# Altium PCB SV601286G_PCB.PcbDoc (part 1 of 2)
Units mil, origin at the board's own origin, x right, y up, seen from the top; angles counter-clockwise.
Board outline 2750 x 2300 mil, 2 copper layers (Top Layer, Bottom Layer), stack 61 mil thick; 81 components, 27 nets, 133 pads, 50 vias.
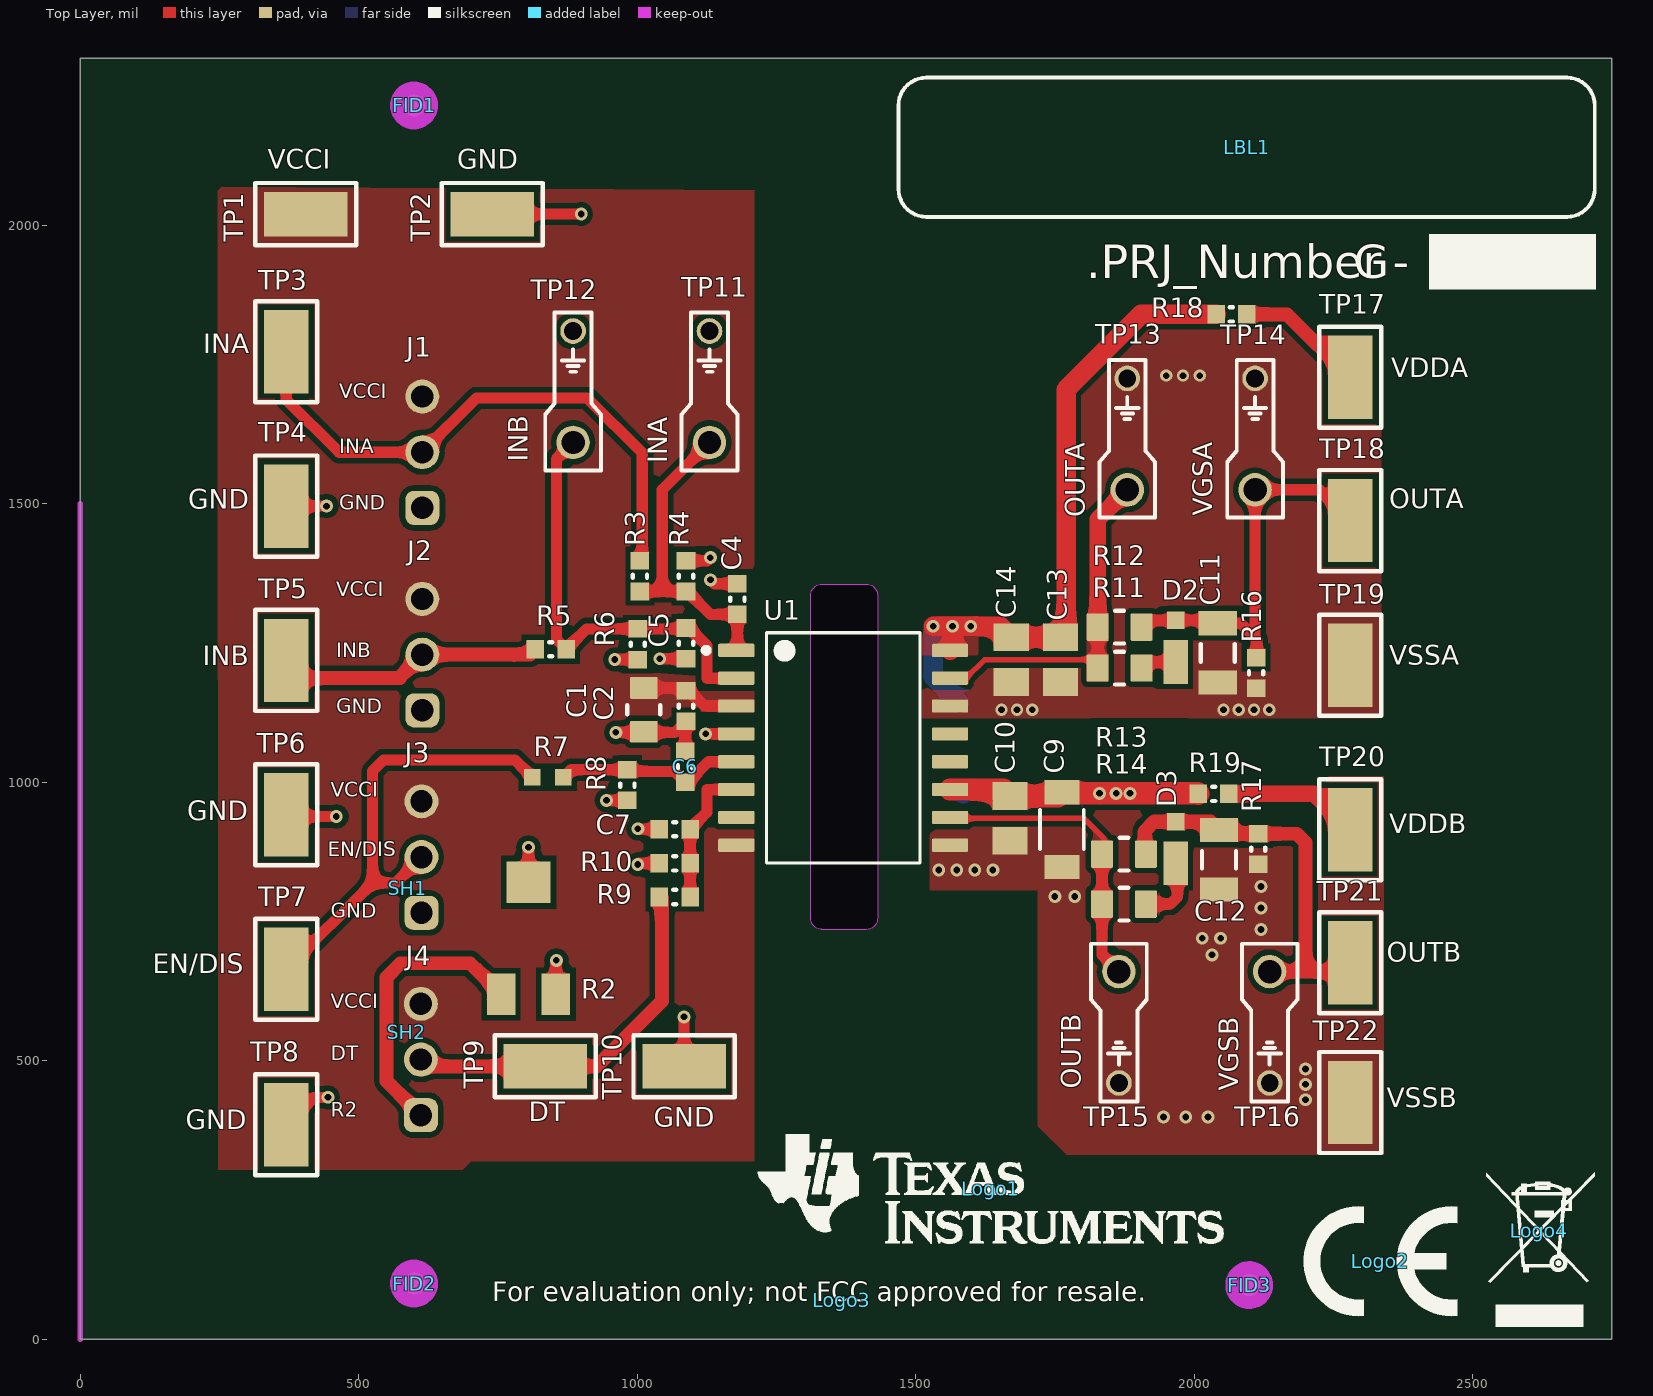
[diagram p0: Top Layer view]
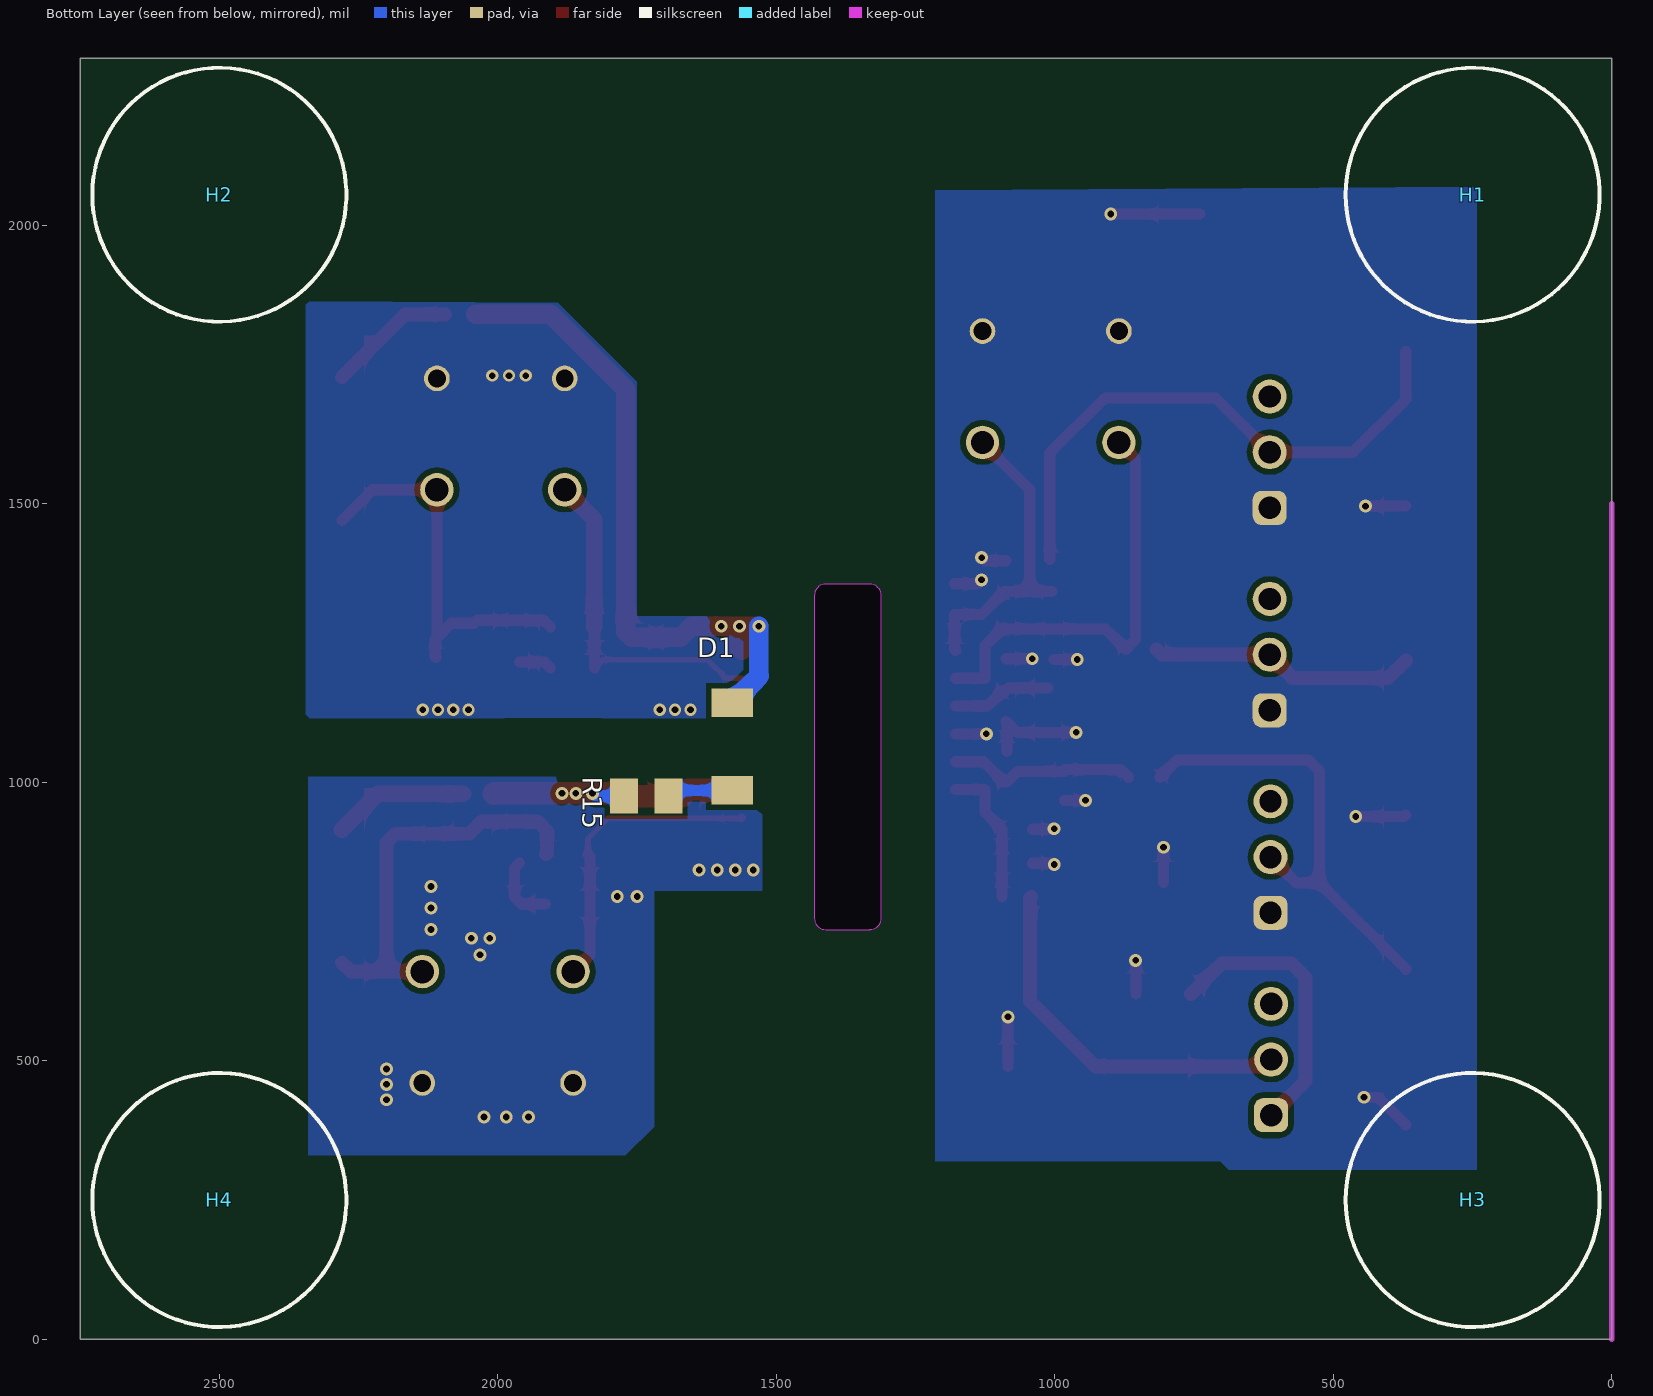
[diagram p1: Bottom Layer view, seen from below]

## Layer stack, top to bottom
Top Solder: solder mask 0.4, Solder Resist, Dk 3.5
Top Layer: signal copper 1.4
Dielectric1: core 58.2, FR-4, Dk 4.8
Bottom Layer: signal copper 1.4
Bottom Solder: solder mask 0.4, Solder Resist, Dk 3.5

## Board outline
0,0 2750,0 2750,2300 0,2300
cut-out: 1311.72,755.79 1311.72,1335.4 cw(c1331.72,1335.4) 1331.72,1355.4 1411.72,1355.4 cw(c1411.72,1335.4) 1431.72,1335.4 1431.72,755.4 cw(c1411.72,755.4) 1411.72,735.4 1331.72,735.4 1331.72,735.79 cw(c1331.72,755.79)

## Design rules (kind name [scope] priority, off if disabled: settings)
AcuteAngle [All] p1: minimum=4.50000000000000E+0001 checktracksonly=FALSE
AssemblyTestPointUsage [All] p1: valid=2
Clearance Clearance_1 [InNetClass('Ch-A') vs InNetClass('Ch-B')] p1: gap=80 ignorepadtopadclearanceinfootprint=FALSE except(0: Arc-Hole Track-Hole SMDPad-Hole THPad-Hole Via-Hole Fill-Hole Poly-Hole Region-Hole Text-Hole)
Clearance Clearance_Keepouts [((IsTrack Or IsArc) And Not InPoly) And IsFree and IsKeepOut vs ((IsTrack Or IsArc) And Not InPoly) And IsFree and IsKeepOut] p2: gap=10 ignorepadtopadclearanceinfootprint=FALSE except(0: Arc-Hole Track-Hole SMDPad-Hole THPad-Hole Via-Hole Fill-Hole Poly-Hole Region-Hole Text-Hole)
Clearance Clearance_BoardEdge_MountingHoles [OnCopper and InComponentClass('Mounting Holes') vs IsKeepOut] p3: gap=35 ignorepadtopadclearanceinfootprint=FALSE except(0: Arc-Hole Track-Hole SMDPad-Hole THPad-Hole Via-Hole Fill-Hole Poly-Hole Region-Hole Text-Hole)
Clearance Clearance_BoardEdge_Poly [OnCopper and InPoly vs IsKeepOut] p4: gap=25 ignorepadtopadclearanceinfootprint=FALSE except(0: Arc-Hole Track-Hole SMDPad-Hole THPad-Hole Via-Hole Fill-Hole Poly-Hole Region-Hole Text-Hole)
Clearance Clearance_BoardEdge [OnCopper and Not InComponentClass('Logo') and not InComponentClass('FiducialMark') and not InRegion(1000,500,4000,800) and Not IsKeepout vs IsKeepOut] p5: gap=35 ignorepadtopadclearanceinfootprint=FALSE except(0: Arc-Hole Track-Hole SMDPad-Hole THPad-Hole Via-Hole Fill-Hole Poly-Hole Region-Hole Text-Hole)
Clearance Clearance_Poly [InPolygon] p6: gap=10 ignorepadtopadclearanceinfootprint=FALSE except(0: Arc-Hole Track-Hole SMDPad-Hole THPad-Hole Via-Hole Fill-Hole Poly-Hole Region-Hole Text-Hole)
Clearance [All] p7: gap=10 ignorepadtopadclearanceinfootprint=FALSE
ComponentClearance ComponentClearance_MountingHoles_FiducialMarks [InComponentClass('Mounting Holes') vs InComponentClass('FiducialMark')] p1: gap=20 collisioncheckmode=3 verticalgap=10 showdistances=FALSE
ComponentClearance ComponentClearance_Shunt [InComponentClass('Header') vs InComponentClass('Shunt')] p2: gap=0 collisioncheckmode=3 verticalgap=0 showdistances=FALSE
ComponentClearance ComponentClearance_Logo [InComponentClass('Logo')] p3: gap=20 collisioncheckmode=3 verticalgap=10 showdistances=FALSE
ComponentClearance ComponentClearance_ScrewToNut [(HasFootprint('NY PMS 440 0025 PH')) vs (HasFootprint('Keystone_1902C'))] p4: gap=5 collisioncheckmode=3 verticalgap=10 showdistances=FALSE
ComponentClearance ComponentClearance_MountingHoles [InComponentClass('Mounting Holes')] p5: gap=20 collisioncheckmode=3 verticalgap=100000 showdistances=TRUE
ComponentClearance ComponentClearance_SmallPassives [HasFootprint('0201*') or HasFootprint('0402*') or HasFootprint('0508') or HasFootprint('0603*') or HasFootprint('0612') or HasFootprint('0805*') or HasFootprint('0815*') or HasFootprint('0830*') or HasFootprint('1206*') or HasFootprint('1210*') or HasFootprint('1808*') or HasFootprint('1812*') or HasFootprint('1825*') or HasFootprint('2010*') or HasFootprint('2220*') or HasFootprint('2225*') or HasFootprint('2512*') or HasFootprint('2728*') or HasFootprint('3518*') vs HasFootprint('0201*') or HasFootprint('0402*') or HasFootprint('0508') or HasFootprint('0603*') or HasFootprint('0612') or HasFootprint('0805*') or HasFootprint('0815*') or HasFootprint('0830*') or HasFootprint('1206*') or HasFootprint('1210*') or HasFootprint('1808*') or HasFootprint('1812*') or HasFootprint('1825*') or HasFootprint('2010*') or HasFootprint('2220*') or HasFootprint('2225*') or HasFootprint('2512*') or HasFootprint('2728*') or HasFootprint('3518*')] p6: gap=5 collisioncheckmode=3 verticalgap=10 showdistances=TRUE
ComponentClearance ComponentClearance_THtoSMT [IsThruComponent vs IsSMTComponent] p7: gap=10 collisioncheckmode=3 verticalgap=30 showdistances=TRUE
ComponentClearance ComponentClearance_THtoTH [IsThruComponent vs IsThruComponent] p8: gap=20 collisioncheckmode=3 verticalgap=30 showdistances=TRUE
ComponentClearance [All] p9: gap=10 collisioncheckmode=3 verticalgap=10 showdistances=TRUE
DiffPairsRouting [All] p1: maxlimit=100 minlimit=10 mostfreqgap=10 toplayer_minwidth=15 toplayer_maxwidth=15 toplayer_prefwidth=15 bottomlayer_minwidth=15 bottomlayer_maxwidth=15 bottomlayer_prefwidth=15 maxuncoupledlength=1000
FabricationTestPointUsage TestPointUsage [All] p1: valid=2 allowmultiple=FALSE
FabricationTestpoint Testpoint [All] p1: side=3 testpointundercomponent=TRUE minsize=40 maxsize=100 preferedsize=60 minholesize=0 maxholesize=40 preferedholesize=32 testpointgrid=1 allowsidetop=TRUE allowsidebottom=TRUE usegrid=TRUE gridtolerance=0.01
FanoutControl Fanout_LCC [IsLCC] p1: bgadir=Out bgaviamode=Centered fanoutstyle=Auto fanoutdirection=Alternating viagrid=1 // Fanout_LCC (Default Rule)
FanoutControl Fanout_BGA [IsBGA] p2: bgadir=Out bgaviamode=Centered fanoutstyle=Auto fanoutdirection=Alternating viagrid=1 // Fanout_BGA (Default Rule)
FanoutControl Fanout_Default [All] p4: bgadir=Out bgaviamode=Centered fanoutstyle=Auto fanoutdirection=Alternating viagrid=1 // Fanout_Default (Default Rule)
FanoutControl Fanout_Small [(CompPinCount < 5)] p5: bgadir=Out bgaviamode=Centered fanoutstyle=Auto fanoutdirection=OutThenIn viagrid=1 // Fanout_Small (Default Rule)
HoleSize [All] p1: absolutevalues=TRUE maxlimit=251 minlimit=8 maxpercent=80.000 minpercent=20.000
MinimumAnnularRing MinimumAnnularRing_ThermalPadVias [IsVia and InAnyComponent] p1: minimumring=5.91
MinimumAnnularRing [All] p2: minimumring=5
MinimumSolderMaskSliver MinimumSolderMaskSliver_Logo [InComponentClass('Logo') vs InComponentClass('Logo')] p1: minsoldermaskwidth=0.7
MinimumSolderMaskSliver [All] p2: minsoldermaskwidth=0
PlaneConnect [All] p1: planeconnectstyle=Relief reliefexpansion=10 reliefentries=4 reliefconductorwidth=10 reliefairgap=10
PolygonConnect [All] p1: connectstyle=Direct reliefconductorwidth=20 reliefentries=4 polygonreliefangle="90 Angle" airgapwidth=10
RoutingVias ThermalPadVias [IsVia and InAnyComponent] p1: holewidth=7.87 width=19.68 viastyle="Through Hole" minholewidth=7.87 minwidth=19.68 maxholewidth=12.99 maxwidth=26
RoutingVias [All] p2: holewidth=16 width=34 viastyle="Through Hole" minholewidth=7.87 minwidth=20 maxholewidth=40 maxwidth=65
SilkToBoardRegionClearance [Not ((IsComment or IsDesignator) And (Hide <> 'False')) and not InRegion(1000,500,4000,800)] p1:
SilkToSilkClearance SilkToSilkClearance_Pb-FreeLogo [(HasFootprint('Pb-Free_Overlay_Medium') OR HasFootprint('Pb-Free_Overlay_Small')) vs (HasFootprint('Pb-Free_Overlay_Medium') OR HasFootprint('Pb-Free_Overlay_Small'))] p1: silktosilkclearance=0
SilkToSilkClearance [All] p2: silktosilkclearance=2
SilkToSolderMaskClearance "Silk to Solder Mask Opening" [All] p1: minsilkscreentomaskgap=0 clearancetoexposedcopper=FALSE
SolderMaskExpansion [All] p1: expansion=1.97
UnRoutedNet [All] p1: checkbadconnections=TRUE
Width [All] p1: maxlimit=100 minlimit=6 preferedwidth=20 minimp=50.000000 maximp=50.000000 favimp=50.000000 checkconnectedcopper=TRUE
14 further rules are at their usual default settings.

## Classes and differential pairs
net class Ch-B: NetD1_2 NetD3_1 NetR19_2 OUTB OUTB_CAP VDDB VSSB
net class Ch-A: NetD2_1 NetR18_2 OUTA OUTA_CAP VDDA VSSA
component class Label: LBL1
component class AssemblyNote: ZZ1 ZZ2 ZZ3 ZZ4 ZZ5 ZZ6 ZZ7
component class Header: J1 J2 J3 J4
component class SV601286F_Schematic: C1 C2 C4 C5 C6 C7 C9 C10 C11 C12 C13 C14 D1 D2 D3 J1 J2 J3 J4 R2 R3 R4 R5 R6 R7 R8 R9 R10 R11 R12 R13 R14 R15 R16 R17 R18 R19 TP1 TP2 TP3 TP4 TP5 TP6 TP7 TP8 TP9 TP10 TP11 TP12 TP13 TP14 TP15 TP16 TP17 TP18 TP19 TP20 TP21 TP22 U?
component class Logo: Logo1
component class FiducialMark: FID1 FID2 FID3
component class Shunt: SH1 SH2
component class SV601286F_Hardware: FID1 FID2 FID3 H1 H2 H3 H4 LBL1 Logo1 Logo2 Logo3 Logo4 SH1 SH2 ZZ1 ZZ2 ZZ3 ZZ4 ZZ5 ZZ6 ZZ7

## Components (designator, comment, footprint, x,y, rotation, side; value= is the part's Value field where it differs from the comment)
C1 "CL21B105KBFNFNE" 0805_HV1 1012.03,1130 r270 top value=1uF
C2 "C1608X7R1E104K080AA" 0603L 1087.81,1136.79 r270 top value=0.1uF
C4 "GRM1885C1H330JA01D" 0603L 1180,1328.84 r90 top value=33pF
C5 "GRM1885C1H330JA01D" 0603L 1087.81,1249.35 r270 top value=33pF
C6 "C0603C222K5RACTU" 0603L 1086.26,1027.7 r90 top value=2200pF
C7 "C0603C222K5RACTU" 0603L 1067.56,915.68 r180 top value=2200pF
C9 "CL31B106KBHNNNE" 1206_180 1762.59,915 r270 top value=10uF
C10 "C0805C104J5RACTU" 0805_HV 1669.17,935 r90 top value=0.1uF
C11 "GRM3195C1H102JA01D" 1206L 2042.44,1232.36 r270 top value=1000pF
C12 "GRM3195C1H102JA01D" 1206L 2044.66,860.83 r270 top value=1000pF
C13 "CL21B105KBFNFNE" 0805_HV 1760.41,1220.24 r270 top value=1uF
C14 "C0805C104J5RACTU" 0805_HV 1671.71,1220.24 r270 top value=0.1uF
D1 "600V" SMA 1579.2,1064.1 r270 bottom
D2 "30V" MicroSMP 1966.97,1241.47 r90 top
D3 "30V" MicroSMP 1966.97,880 r90 top
FID1 "Fiducial" Fiducial10-20 599.53,2215 r0 top
FID2 "Fiducial" Fiducial10-20 599.53,100 r0 top
FID3 "Fiducial" Fiducial10-20 2098.94,97.16 r0 top
H1 "SJ-5303 (CLEAR)" Bumpon_SJ5003Transparent 250,2054.73 r180 bottom locked
H2 "SJ-5303 (CLEAR)" Bumpon_SJ5003Transparent 2500,2054.73 r180 bottom locked
H3 "SJ-5303 (CLEAR)" Bumpon_SJ5003Transparent 250,250 r180 bottom locked
H4 "SJ-5303 (CLEAR)" Bumpon_SJ5003Transparent 2500,250 r180 bottom locked
J1 "TSW-103-07-T-S" Samtec_TSW-103-07-T-S 614.26,1592.49 r90 top
J2 "TSW-103-07-T-S" Samtec_TSW-103-07-T-S 614.26,1229.04 r90 top
J3 "TSW-103-07-T-S" Samtec_TSW-103-07-T-S 612.85,865.59 r90 top
J4 "TSW-103-07-T-S" Samtec_TSW-103-07-T-S 611.71,502.14 r90 top
LBL1 "Label" Label_1250x250 2094.19,2140 r0 top
Logo1 "Texas Instruments" TI_Stacked_Overlay_Small 1635,270 r0 top
Logo2 "CE Mark" CE_Mark_5mm 2334.33,140 r0 top
Logo3 "FCC disclaimer" FCC_disclaimer 1367.02,70 r0 top
Logo4 "WEEE logo" WEEE_Minimum 2620,194.93 r0 top
R2 "3224X-1-104E" TRIM_3224X 805,720 r90 top value=100K
R3 "CRCW0603100RFKEA" 0603L 1005,1370 r270 top value=100
R4 "ERJ-3EKF1002V" 0603L 1087.81,1370 r270 top value=10.0k
R5 "CRCW0603100RFKEA" 0603L 845,1238.65 r0 top value=100
R6 "ERJ-3EKF1002V" 0603L 1001.2,1247.8 r90 top value=10.0k
R7 "CRCW0603100RFKEA" 0603_HV 839.55,1009 r0 top value=100
R8 "ERJ-3EKF1002V" 0603L 982.5,995 r90 top value=10.0k
R9 "RCS06030000Z0EA" 0603L 1067.56,793.9 r0 top value=0
R10 "ERJ-3EKF1002V" 0603L 1067.56,854.41 r0 top value=10.0k
R11 "RC0805FR-073R9L" 0805_HV1 1866.19,1205.06 r0 top value=3.90
R12 "ERJ-P06F10R0V" 0805_HV1 1866.19,1278.55 r0 top value=10.0
R13 "ERJ-P06F10R0V" 0805_HV1 1874.06,871 r0 top value=10.0
R14 "RC0805FR-073R9L" 0805_HV1 1874.06,781.26 r0 top value=3.90
R15 "RC0805FR-073R9L" 0805_HV 1733.86,975 r180 bottom value=3.90
R16 "ERJ-3EKF1002V" 0603L 2111.24,1196.2 r90 top value=10.0k
R17 "ERJ-3EKF1002V" 0603L 2115,880 r90 top value=10.0k
R18 "RCS06030000Z0EA" 0603L 2067.05,1840 r0 top value=0
R19 "RCS06030000Z0EA" 0603L 2035,979.1 r0 top value=0
SH1 "Shunt" SPC02SYAN 587.85,810 r90 top value=1x2
SH2 "Shunt" SPC02SYAN 586.71,551.11 r90 top value=1x2
TP1 "VCCI" Keystone_5019 404.84,2020 r180 top
TP2 "GND" Keystone_5019 740,2020 r180 top
TP3 "INA" Keystone_5019 370,1772.87 r90 top
TP4 "GND" Keystone_5019 370,1495.73 r90 top
TP5 "INB" Keystone_5019 370,1218.59 r90 top
TP6 "GND" Keystone_5019 370,941.45 r90 top
TP7 "EN/DIS" Keystone_5019 370,664.3 r90 top
TP8 "GND" Keystone_5019 370,385 r90 top
TP9 "DT" Keystone_5019 835,490 r180 top
TP10 "GND" Keystone_5019 1084.32,490 r180 top
TP11 "INA" TESTPOINT_PIGTAIL 1129.98,1610 r180 top
TP12 "INB" TESTPOINT_PIGTAIL 885,1610 r180 top
TP13 "OUTA" TESTPOINT_PIGTAIL 1880,1525 r180 top
TP14 "VGSA" TESTPOINT_PIGTAIL 2109.46,1525 r180 top
TP15 "OUTB" TESTPOINT_PIGTAIL 1865,660 r0 top
TP16 "VGSB" TESTPOINT_PIGTAIL 2135.63,660 r0 top
TP17 "VDDA" Keystone_5019 2280,1727.07 r90 top
TP18 "OUTA" Keystone_5019 2280,1469.83 r90 top
TP19 "VSSA" Keystone_5019 2280,1209.83 r90 top
TP20 "VDDB" Keystone_5019 2280,914.8 r90 top
TP21 "OUTB" Keystone_5019 2280,675.89 r90 top
TP22 "VSSB" Keystone_5019 2280,425 r90 top
U1 "UCC21520DW" DW0016B-MFG 1370,1061.8 r0 top
ZZ1 "These assemblies are ESD sensitive, ESD precautions shall be observed." AssemblyNote 220,3510 r0 top
ZZ2 "These assemblies must be clean and free from flux and all contaminants. Use of no clean flux is not acceptable." AssemblyNote 220,3310 r0 top
ZZ3 "These assemblies must comply with workmanship standards IPC-A-610 Class 2, unless otherwise specified." AssemblyNote 220,3120 r0 top
ZZ4 "For -001: Shunt #1 (SH1) should be installed in PIN 1-2 for J3" AssemblyNote 220,2930 r0 top
ZZ5 "For -002 and -003: Shunt #1 (SH1) should be installed in PIN 2-3 for J3" AssemblyNote 220,2770 r0 top
ZZ6 "Shunt #2 (SH2) should be installed in PIN 2-3 for J4" AssemblyNote 220,2590 r0 top
ZZ7 "Install label in silkscreen box after final wash. Text shall be 8pt font. Text shall be per Label Table in PDF schematic." AssemblyNote 220,2425 r0 top

## Footprints (in the part's own frame and the unit in brackets; to place one, negate y for a bottom-side part, rotate by r counter-clockwise, add the part's x,y. Pads: shape width x height; smd on the part's side, far side on the other; paste and mask are expansions set on the pad)
0603_HV [mil] "Ernesto recommended land pattern.  26 mil between pads."
  rect 30x30 smd: 1(-28,0) 2(28,0)
  body extent -34,-19 34,19, height 39
0603L [mm] "0603 from SM-752 data"
  rect 0.8x0.85 smd: 1(-0.7,0) 2(0.7,0)
  silkscreen extent -0.07,-0.33 0.07,0.33, body extent -0.87,-0.47 0.87,0.47, height 1
0805_HV [mil] "0805 with 30mil clearance between pads"
  rect 50x63 smd: 1(-40,0) 2(40,0)
  body extent -43,-29 43,29, height 57
0805_HV1 [mm] "Custom footprint based on analyzing multiple manufacturer recommendations"
  rrect10% 1x1.25 smd: 1(-1,0) 2(1,0)
  silkscreen extent -0.2,-0.75 0.2,0.75, body extent -1.1,-0.72 1.1,0.73, height 1.45
1206_180 [mm] "1206_180"
  rect 1.1x1.6 smd: 1(-1.7,0) 2(1.7,0)
  silkscreen extent -0.9,-1 0.9,1, body extent -1.75,-0.95 1.75,0.95, height 1.8
1206L [mm] "1206 from SM-752 data"
  rect 1.1x1.75 smd: 1(-1.35,0) 2(1.35,0)
  silkscreen extent -0.4,-0.77 0.4,0.77, body extent -1.7,-0.9 1.7,0.9, height 1.35
AssemblyNote [mil] "Assembly Note"
Bumpon_SJ5003Transparent [mil] "3M Hemispherical Bumpon transparent"
  round 1 on Mech4: 0(0,0)
  silkscreen extent -228,-228 228,228, body extent -219,-219 219,219, height 197
CE_Mark_5mm [mil] "Minimum text height for CE Mark"
  silkscreen extent -138,-98 138,98
DW0016B-MFG [mm]
  rrect17% 1.65x0.6 smd paste+0 mask+0: 1(-4.875,4.445) 2(-4.875,3.175) 3(-4.875,1.905) 4(-4.875,0.635) 5(-4.875,-0.635) 6(-4.875,-1.905) 7(-4.875,-3.175) 8(-4.875,-4.445) 9(4.875,-4.445) 10(4.875,-3.175) 11(4.875,-1.905) 12(4.875,-0.635) 13(4.875,0.635) 14(4.875,1.905) 15(4.875,3.175) 16(4.875,4.445)
  silkscreen extent -6.37,-5.25 3.5,5.25, body extent -5.8,-5.5 5.8,5.5, height 0.25
FCC_disclaimer [mil]
Fiducial10-20 [mm]
  round 1 smd mask+0.5: 1(0,0)
  Top Layer keep-out circle w1.178: c0,0 r0.5
Keystone_5019 [mm] "Test Point, Miniature, SMT"
  rect 3.8x2.03 smd: 1(0,0)
  silkscreen extent -2.31,-1.42 2.31,1.42, body extent -1.9,-1.02 1.9,1.02, height 2.29
Label_1250x250 [mil] "Thermal Transfer Labels"
  round 1 on Mech13: 0(0,0)
  silkscreen extent -625,-125 625,125, body extent -625,-125 625,125, height 1
MicroSMP [mm] "SMD, 2-Leads, Body 2.2x1.3mm"
  rect 2x1.1 smd: 1(-0.65,0)
  rect 0.8x0.8 smd: 2(1.25,0)
  body extent -1.15,-0.7 1.15,0.7, height 0.75
Samtec_TSW-103-07-T-S [mm] "Header, 2.54 mm, 3x1, TH"
  rrect50% 1.55x1.55 hole 1.02: 1(-2.54,0)
  round 1.55 hole 1.02: 2(0,0) 3(2.54,0)
  body extent -3.81,-1.27 3.81,1.27, height 8.39
SMA [mm] "Molded Diode, 2-Leads, Body 4.3x2.6mm, IPC Medium Density, based on OnSemi component dimensions and land pattern"
  rect 1.3x1.9 smd: 1(-2,0) 2(2,0)
  body extent -2.6,-1.3 2.6,1.3, height 2.42
SPC02SYAN [mil] "SULLINS"
  round 1 on Mech3: 0(0,0)
  body extent -98,-47 99,47, height 366
TESTPOINT_PIGTAIL [mil] "Pigtail"
  round 60 hole 42: 1(0,0)
  round 46 hole 32: 2(0,-200)
  silkscreen extent -50,-233 50,50
TI_Stacked_Overlay_Small [mil]
  silkscreen extent -418,-98 418,98
TRIM_3224X [mm] "Bourns"
  rect 1.9x1.3 smd: 1(-2.55,1.25) 3(-2.55,-1.25)
  rect 1.9x2 smd: 2(2.55,0)
  body extent -1.8,-2.4 1.8,2.4, height 5.31
WEEE_Minimum [mil] "WEEElie bin"
  silkscreen extent -95,-172 99,104

## Part data
C1 C13: library part CMP-0080611-1, "CAP, CERM, 1 µF, 50 V,+/- 10%, X7R, 0805", Cap_Case=0805, Manufacturer=Samsung, Supplier Part Number 1=1276-2928-1-ND, TempCo=X7R, Tolerance_%=10%, Value2=50V, ValueDisplayed=1µF, AEC Category=Q200, AEC Grade=N/A, AEC Qualified=N, Cap_F=1µF, ComponentLink1Description="Datasheet link", ComponentLink1URL=http://www.samsungsem.com/kr/support/product-search/mlcc/__icsFiles/afieldfile/2016/08/18/S_CL21B105KBFNFNE.pdf, CompType=Capacitor, MountType=SMT, PackageReference=0805, PartNumber=CL21B105KBFNFNE, Polarized=N, RoHS=Y, SizeArea_mm2=2.5, SizeAreaWB_mm2=6.75, SizeX_mm=2, SizeY_mm=1.25, SizeZ_mm=1.45, Supplier 1=Digi-Key, TaMax_C=125°C, TaMin_C=-55°C, Technology=Ceramic, U/M=EA, VDC_V=50V
C2: library part CMP-0007039-5, "CAP, CERM, 0.1 uF, 25 V, +/- 10%, X7R, 0603", Cap_Case=0603, Manufacturer=TDK, Supplier Part Number 1=445-1316-1-ND, TempCo=X7R, Tolerance_%=10%, Value1=Unknown, Value2=25V, ValueDisplayed=0.1uF, AEC Category=Q200, AEC Qualified=?, Cap_F=100nF, ComponentLink1Description="Datasheet link", ComponentLink1URL=http://www.tdk.com/pdf/TDKMLCCCapRange.pdf, CompType=Capacitor, LatestRevisionDate=2017-03-09, MountType=SMT, PackageReference=0603, PartNumber=C1608X7R1E104K080AA, Polarized=N, Published=2008-06-19, Publisher="Texas Instruments", RoHS=Y, SizeArea_mm2=1.28, SizeAreaWB_mm2=4.68, SizeX_mm=1.6, SizeY_mm=0.8, SizeZ_mm=1, Supplier 1=Digi-Key, Supplier 2=Newark, Supplier Part Number 2=87R3692, TaMax_C=125°C, TaMin_C=-55°C, Technology=Ceramic, U/M=EA, VDC_V=25V
C4 C5: library part CMP-0007208-4, "CAP, CERM, 33 pF, 50 V, +/- 5%, C0G/NP0, 0603", Cap_Case=0603, Manufacturer=MuRata, Supplier Part Number 1=490-1415-1-ND, TempCo=C0G/NP0, Tolerance_%=5%, Value1=Unknown, Value2=50V, ValueDisplayed=33pF, AEC Category=Q200, AEC Qualified=?, Cap_F=33pF, ComponentLink1Description="Datasheet link", ComponentLink1URL=http://search.murata.co.jp/Ceramy/PnsearchViewAction.do?HnOFG=ON&HnNFG=ON&SEL_CNT=50&sLang=en&sKey=GRM1885C1H330JA01D&x=9&y=9&search=startwith, CompType=Capacitor, LatestRevisionDate=2017-03-09, MountType=SMT, PackageReference=0603, PartNumber=GRM1885C1H330JA01D, Polarized=N, Published=2008-06-19, Publisher="Texas Instruments", RoHS=Y, SizeArea_mm2=1.28, SizeAreaWB_mm2=4.68, SizeX_mm=1.6, SizeY_mm=0.8, SizeZ_mm=1, Supplier 1=Digi-Key, Supplier 2=Mouser, Supplier 3=Farnell, Supplier Part Number 2=81-GRM39C330J50, Supplier Part Number 3=1828910, TaMax_C=125°C, TaMin_C=-55°C, Technology=Ceramic, U/M=EA, VDC_V=50V
C6 C7: library part CMP-0006898-4, "CAP, CERM, 2200 pF, 50 V, +/- 10%, X7R, 0603", Cap_Case=0603, Manufacturer=Kemet, Supplier Part Number 1=399-1085-1-ND, TempCo=X7R, Tolerance_%=10%, Value1=Unknown, Value2=50V, ValueDisplayed=2200pF, AEC Category=Q200, AEC Qualified=?, Cap_F=2.2nF, ComponentLink1Description="Datasheet link", ComponentLink1URL=http://www.kemet.com/kemet/web/homepage/kechome.nsf/vapubfiles/F3102_Y5V.pdf/$file/F3102_Y5V.pdf, CompType=Capacitor, LatestRevisionDate=2017-03-09, MountType=SMT, PackageReference=0603, PartNumber=C0603C222K5RACTU, Polarized=N, Published=2008-06-19, Publisher="Texas Instruments", RoHS=Y, SizeArea_mm2=1.28, SizeAreaWB_mm2=4.68, SizeX_mm=1.6, SizeY_mm=0.8, SizeZ_mm=1, Supplier 1=Digi-Key, Supplier 2=Mouser, Supplier 3=Farnell, Supplier Part Number 2=80-C0603C222K5R, Supplier Part Number 3=1414624, TaMax_C=125°C, TaMin_C=-55°C, Technology=Ceramic, U/M=EA, VDC_V=50V
C9: library part CMP-0008802-1, "CAP, CERM, 10 uF, 50 V, +/- 10%, X7R, 1206", Cap_Case=1206, Manufacturer=Samsung, Supplier Part Number 1=1276-6767-1-ND, TempCo=X7R, Tolerance_%=10%, Value1=Unknown, Value2=50V, ValueDisplayed=10uF, AEC Category=Q200, AEC Grade=N/A, AEC Qualified=N, Cap_F=10µF, ComponentLink1Description="Datasheet link", ComponentLink1URL=https://www.samsungsem.com/kr/front/downloadcms.do?path=%2Fkr%2Fsupport%2Fproduct-search%2Fmlcc%2F__icsFiles%2Fafieldfile%2F2016%2F01%2F04&fileName=Data+sheet_CL31B106KBHNNNE.pdf, CompType=Capacitor, LatestRevisionDate=2017-03-09, MountType=SMT, PackageReference=1206, PartNumber=CL31B106KBHNNNE, Polarized=N, Published=2008-06-19, Publisher="Texas Instruments", RoHS=Y, SizeArea_mm2=5.12, SizeAreaWB_mm2=10.92, SizeX_mm=3.2, SizeY_mm=1.6, SizeZ_mm=1.8, Supplier 1=Digi-Key, TaMax_C=125°C, TaMin_C=-55°C, Technology=Ceramic, U/M=EA
C10 C14: library part CMP-0007721-1, "CAP, CERM, 0.1 uF, 50 V, +/- 5%, X7R, 0805", Cap_Case=0805, Manufacturer=Kemet, Supplier Part Number 1=64K2889, TempCo=X7R, Tolerance_%=5%, Value1="0.064 ohm", Value2=50V, ValueDisplayed=0.1uF, AEC Category=Q200, AEC Qualified=?, Cap_F=100nF, ComponentLink1Description="Datasheet link", ComponentLink1URL=http://www.kemet.com/kemet/web/homepage/kechome.nsf/file/Partial%20Copy%20-%20Ceramic%20Surface%20Mount%20Capacitors/$file/F3102_CE.pdf, CompType=Capacitor, ESR_Ohm=0.064, IRMS_A=1.64A, LatestRevisionDate=2017-03-09, MountType=SMT, PackageReference=0805, PartNumber=C0805C104J5RACTU, Polarized=N, Published=2008-06-19, Publisher="Texas Instruments", RoHS=Y, SizeArea_mm2=2.5, SizeAreaWB_mm2=6.75, SizeX_mm=2, SizeY_mm=1.25, SizeZ_mm=1.45, Supplier 1=Newark, Supplier 2=Mouser, Supplier 3=Farnell, Supplier Part Number 2=80-C0805C104J5R, Supplier Part Number 3=1414663, TaMax_C=125°C, TaMin_C=-55°C, Technology=Ceramic, U/M=EA
C11 C12: library part CMP-0008829-2, "CAP, CERM, 1000 pF, 50 V, +/- 5%, C0G/NP0, 1206", Cap_Case=1206, Manufacturer=MuRata, Supplier Part Number 1=490-1749-1-ND, TempCo=C0G/NP0, Tolerance_%=5%, Value1=Unknown, Value2=50V, ValueDisplayed=1000pF, AEC Category=Q200, AEC Qualified=?, Cap_F=1nF, ComponentLink1Description="Datasheet link", ComponentLink1URL=http://search.murata.co.jp/Ceramy/PnsearchViewAction.do?HnOFG=ON&HnNFG=ON&SEL_CNT=50&sLang=en&sKey=GRM3195C1H102JA01D&x=9&y=9&search=startwith, CompType=Capacitor, LatestRevisionDate=2017-03-09, MountType=SMT, PackageReference=1206, PartNumber=GRM3195C1H102JA01D, Polarized=N, Published=2008-06-19, Publisher="Texas Instruments", RoHS=Y, SizeArea_mm2=5.12, SizeAreaWB_mm2=10.92, SizeX_mm=3.2, SizeY_mm=1.6, SizeZ_mm=1.35, Supplier 1=Digi-Key, Supplier 2=Mouser, Supplier Part Number 2=81-GRM426C102J050D, TaMax_C=125°C, TaMin_C=-55°C, Technology=Ceramic, U/M=EA, VDC_V=50V
D1: library part CMP-0076908-2, "Diode, Ultrafast, 600 V, 1 A, SMA", Manufacturer=STMicroelectronics, PartNumber=STTH1R06A, Value1=1A, Value2=1V, AEC Category=Q101, AEC Qualified=?, ComponentLink1Description="Datasheet link", ComponentLink1URL=http://www.st.com/web/en/resource/technical/document/datasheet/CD00005135.pdf, CompType=Diode, Green_EU RoHS="Passed with Exemption", Green_EU RoHS-2=Passed, Green_Lifecycle=Active, Green_REACh=Passed, Io_A=1A, MountType=SMT, PackageReference=SMA, RJC_CperW=30.0, RoHS=Y, SizeArea_mm2=16.3228, SizeAreaWB_mm2=37.3428, SizeX_mm=5.59, SizeY_mm=2.92, SizeZ_mm=2.87, TJmax_C=175°C, Type=Ultrafast, Vf_V=1V, Vr_V=600V
D2 D3: library part CMP-0028774-2, "Diode, Schottky, 30 V, 1 A, AEC-Q101, MicroSMP", Manufacturer=Vishay-Semiconductor, PartNumber=MSS1P3L-M3/89A, Value1=1A, Value2=0.35V, AEC Category=Q101, AEC Qualified=Y, ComponentLink1Description="Datasheet link", ComponentLink1URL=http://www.vishay.com/docs/89020/mss1p3l.pdf, CompType=Diode, Green_EU RoHS=Incomplete, Green_EU RoHS-2=Incomplete, Green_Lifecycle="Not Set", Green_REACh=Incomplete, Io_A=1A, MountType=SMT, PackageReference=MicroSMP, RJC_CperW=40, RoHS=Y, SizeArea_mm2=3.25, SizeAreaWB_mm2=8.05, SizeX_mm=2.5, SizeY_mm=1.3, SizeZ_mm=0.73, TJmax_C=150°C, Type=Schottky, Vf_V=350mV, Vr_V=30V
FID1 FID2 FID3: library part CMP-0077181-1, "Fiducial mark.  There is nothing to buy or mount.", Manufacturer=N/A, ClassName=FiducialMark, CompType=Fiducial, MountType=N/A, PackageReference=N/A, PartNumber=N/A
H1 H2 H3 H4: library part CMP-0003620-1, "Bumpon, Hemisphere, 0.44 X 0.20, Clear", Manufacturer=3M, Supplier Part Number 1=SJ5303-7-ND, ComponentLink1Description="Datasheet Link", ComponentLink1URL=http://multimedia.mmm.com/mws/mediawebserver.dyn?6666660Zjcf6lVs6EVs666cIsCOrrrrQ-, CompType=Bumpon, Key="SJ-5303 (CLEAR)", LatestRevisionDate=2017-03-09, MountType=N/A, PackageReference="Transparent Bumpon", PartNumber="SJ-5303 (CLEAR)", Publisher="Texas Instruments", RoHS=Y, Supplier 1=Digi-Key, Supplier 2=Newark, Supplier 3=Mouser, Supplier Part Number 2=23M7326, Supplier Part Number 3=517-SJ-5303CL
J1 J2 J3 J4: library part CMP-0075530-2, "Header, 2.54 mm, 3x1, Tin, TH", Color=Black, Current_A=6.3A, Manufacturer=Samtec, Supplier Part Number 1=SAM1035-03-ND, Voltage_V=550V, Cert_CSA=Y, Cert_CULUS=N, Cert_UL=Y, Cert_VDE=N, ClassName=Header, ComponentLink1Description="Datasheet URL", ComponentLink1URL=http://www.samtec.com/ftppub/cpdf/TSW-XXX-XX-XXX-X-XX-XXX-MKT.pdf, CompType=Header, ContactFinish=Tin, Gender=Male, Green_EU RoHS=Passed, Green_EU RoHS-2=Passed, Green_Lifecycle=Active, Green_REACh=Passed, MountType=TH, Orientation=Vertical, PackageReference="Header, 2.54 mm, 3x1, TH", PartNumber=TSW-103-07-T-S, PinCount=3, Pitch_mm=2.54, RoHS=Y, Row_Count=1, Shrouded=N, Supplier 1=Digi-Key, Supplier 2=Newark, Supplier 3=Farnell, Supplier Part Number 2=12P1325, Supplier Part Number 3=2035682
LBL1: library part CMP-0003624-1, "Thermal Transfer Printable Labels, 1.250\" W x 0.250\" H - 10,000 per roll", Manufacturer=Brady, PartNumber=THT-13-457-10, Supplier Part Number 1=04H3909, ClassName=Label, ComponentLink1Description="Web Page", ComponentLink1URL=http://www.bradyid.com/bradyid/pdpv/THT-13-457-10.html, CompType=Label, Key=THT-13-457-10, LatestRevisionDate=2017-03-09, MountType=N/A, Note="Size: 1.25\" x 0.25\"", PackageReference="PCB Label 1.25 x 0.250 inch", Publisher="Texas Instruments", RoHS=Y, Supplier 1=Newark
Logo1: library part CMP-0074838-1, "Texas Instrument Corporate Signature", ClassName=Logo, LatestRevisionDate=2017-07-06, Lib Reference=TI_Logo, PartNumber="Texas Instruments", Published=2009-03-03, Publisher="Texas Instruments", SymbolCreator=a0412235, SymbolVersion=2011-08-22
Logo2: library part CMP-0074844-1, LatestRevisionDate=2017-07-06, Lib Reference="CE Mark", PartNumber="CE Mark", Published=2009-03-03, Publisher="Texas Instruments", SymbolCreator=a0412235
Logo3: library part CMP-0074847-1, "FCC_disclaimer", LatestRevisionDate=2017-07-06, Lib Reference=FCC_disclaimer, PartNumber="FCC disclaimer", Published=2009-03-03, Publisher="Texas Instruments"
Logo4: library part CMP-0074769-1, Lib Reference="WEEE logo", PartNumber="WEEE logo"
R2: library part CMP-0002065-2, "Trimmer, 100 K, 0.25 W, SMD", Manufacturer=Bourns, Supplier Part Number 1=3224X-1-104ECT-ND, ComponentLink1Description="Datasheet URL", ComponentLink1URL=https://www.bourns.com/data/global/pdfs/3224.pdf, CompType=Trimmer, LatestRevisionDate=09/03/2017, MountType=SMT, PackageReference=3.5x5.3x4.8mm, PartNumber=3224X-1-104E, Publisher="Texas Instruments", RoHS=Y, Supplier 1=Digi-Key, Supplier 2=Newark, Supplier 3=Mouser, Supplier Part Number 2=06X8878, Supplier Part Number 3=652-3224X-1-104E
R3 R5 R7: library part CMP-0021991-4, "RES, 100, 1%, 0.1 W, AEC-Q200 Grade 0, 0603", Manufacturer=Vishay-Dale, Power_W=100mW, Supplier Part Number 1=541-100HCT-ND, TempCo="100 ppm/C", Tolerance_%=1%, Value2=0.1W, Value_Code=100R, ValueDisplayed=100, AEC Category=Q200, AEC Grade=0, AEC Qualified=Y, ComponentLink1Description="Datasheet link", ComponentLink1URL=http://www.vishay.com/docs/20035/dcrcwe3.pdf, CompType=Resistor, EIA_Code=E96, MountType=SMT, PackageReference=0603, PartNumber=CRCW0603100RFKEA, Res_ohm=100, RoHS=E, SizeArea_mm2=1.28, SizeX_mm=1.6, SizeY_mm=0.8, SizeZ_mm=1, Supplier 1=Digi-Key, Supplier 2=Newark, Supplier 3=Mouser, Supplier Part Number 2=52K8078, Supplier Part Number 3=71-CRCW0603-100-E3, Technology="Thick Film", Value1=1%, VDC_V=75V
R4 R6 R8 R10 R16 R17: library part CMP-0022684-3, "RES, 10.0 k, 1%, 0.1 W, 0603", Manufacturer=Panasonic, Power_W=100mW, Supplier Part Number 1=P10.0KHCT-ND, TempCo="100 ppm/C", Tolerance_%=1%, Value2=0.1W, Value_Code=10k0, ValueDisplayed=10.0k, AEC Category=Q200, AEC Qualified=?, ComponentLink1Description="Datasheet link", ComponentLink1URL=http://industrial.panasonic.com/www-data/pdf/AOA0000/AOA0000CE2.pdf, CompType=Resistor, EIA_Code=E96, LatestRevisionDate=2017-03-09, MountType=SMT, PackageReference=0603, PartNumber=ERJ-3EKF1002V, Published=2008-06-26, Publisher="Texas Instruments", Res_ohm=10k, RoHS=Y, SizeArea_mm2=1.28, SizeX_mm=1.6, SizeY_mm=0.8, SizeZ_mm=1, Supplier 1=Digi-Key, Supplier 2=Newark, Supplier 3=Mouser, Supplier Part Number 2=64R5309, Supplier Part Number 3=667-ERJ-3EKF1002V, Technology="Thick Film", U/M=EA, Value1=1%, VDC_V=75V
R9 R18 R19: library part CMP-0081973-1, "RES, 0, 0%, 0.25 W, AEC-Q200 Grade 0, 0603", Manufacturer=Vishay-Dale, Power_W=250mW, Supplier Part Number 1=541-2779-1-ND, Tolerance_%=0%, Value2=0.25W, Value_Code=0, AEC Category=Q200, AEC Grade=0, AEC Qualified=Y, ComponentLink1Description="Datasheet link", ComponentLink1URL=http://www.vishay.com/docs/20065/rcse3.pdf, CompType=Resistor, MountType=SMT, PackageReference=0603, PartNumber=RCS06030000Z0EA, Res_ohm=0, RoHS=Y, SizeArea_mm2=1.28, SizeAreaWB_mm2=4.68, SizeX_mm=1.6, SizeY_mm=0.8, SizeZ_mm=1, Supplier 1=Digi-Key, Supplier 2=Mouser, Supplier Part Number 2=71-RCS06030000Z0EA, Technology="Thick Film", Value1=0%, ValueDisplayed=0
R11 R14 R15: library part CMP-0021926-2, "RES, 3.90, 1%, 0.125 W, 0805", Manufacturer="Yageo America", Power_W=125mW, Supplier Part Number 1=311-3.90CRCT-ND, TempCo="200 ppm/C", Tolerance_%=1%, Value2=0.125W, Value_Code=3R90, ValueDisplayed=3.90, AEC Category=Q200, AEC Qualified=?, ComponentLink1Description="Datasheet link", ComponentLink1URL=http://www.yageo.com/pdf/Pu-RC0805_51_PbFree_L_2.pdf, CompType=Resistor, LatestRevisionDate=2017-03-09, MountType=SMT, PackageReference=0805, PartNumber=RC0805FR-073R9L, Published=2008-06-26, Publisher="Texas Instruments", Res_ohm=3.9, RoHS=Y, SizeArea_mm2=2.5, SizeX_mm=2, SizeY_mm=1.25, SizeZ_mm=1.45, Supplier 1=Digi-Key, Supplier 2=Mouser, Supplier 3=Farnell, Supplier Part Number 2=603-RC0805FR-073R9L, Supplier Part Number 3=9237194, Technology="Thick Film", U/M=EA, Value1=1%, VDC_V=150V
R12 R13: library part CMP-0021849-2, "RES, 10.0, 1%, 0.5 W, AEC-Q200 Grade 0, 0805", Manufacturer=Panasonic, Power_W=500mW, Supplier Part Number 1=P18937CT-ND, TempCo="300 ppm/C", Tolerance_%=1%, Value2=0.5W, Value_Code=10R0, ValueDisplayed=10.0, AEC Category=Q200, AEC Grade=0, AEC Qualified=Y, ComponentLink1Description="Datasheet link", ComponentLink1URL=https://industrial.panasonic.com/cdbs/www-data/pdf/RDA0000/AOA0000C243.pdf, CompType=Resistor, EIA_Code=E96, LatestRevisionDate=2017-03-09, MountType=SMT, PackageReference=0805, PartNumber=ERJ-P06F10R0V, Published=2008-06-26, Publisher="Texas Instruments", Res_ohm=10, RoHS=Y, SizeArea_mm2=2.5, SizeX_mm=2, SizeY_mm=1.25, SizeZ_mm=1.45, Supplier 1=Digi-Key, Supplier 2=Newark, Supplier 3=Mouser, Supplier Part Number 2=32R9412, Supplier Part Number 3=667-ERJ-P06F10R0V, Technology="Thick Film", U/M=EA, Value1=1%
SH1 SH2: library part CMP-0003642-1, "Shunt, 100mil, Flash Gold, Black", Manufacturer="Sullins Connector Solutions", PartNumber=SPC02SYAN, Supplier Part Number 1=S9001-ND, ClassName=Shunt, ComponentLink1Description="Datasheet Link", ComponentLink1URL=http://www.sullinscorp.com/drawings/134_C02SYAN_11134.pdf, CompType=Shunt, Key=SPC02SYAN, LatestRevisionDate=2017-03-09, MountType=N/A, Note="You can \"mate\" this to a header by matching the designator.  i.e. use SH-J3 for header J3", PackageReference="Closed Top 100mil Shunt", Publisher="Texas Instruments", RoHS=Y, Supplier 1=Digi-Key
TP1 TP2 TP3 TP4 TP5 TP6 TP7 TP8 TP9 TP10 TP17 TP18 TP19 TP20 TP21 TP22: library part CMP-0055162-1, "Test Point, Miniature, SMT", Manufacturer=Keystone, PartNumber=5019, Supplier Part Number 1=36-5019TR-ND, CNHeader=FALSE, ComponentLink1Description="Datasheet URL", ComponentLink1URL=http://www.keyelco.com/product-pdf.cfm?p=1357, CompType="Test Point", CT=TRUE, Green_EU RoHS=Passed, Green_EU RoHS-2=Incomplete, Green_Lifecycle=Active, Green_REACh=Passed, LatestRevisionDate=26/05/2017, MountType=SMT, PackageReference="Test Point, Miniature, SMT", Publisher="Texas Instruments", RoHS=Y, Supplier 1=Digi-Key, Supplier 2=Mouser, Supplier Part Number 2=534-5019
TP11 TP12 TP13 TP14 TP15 TP16: library part CMP-0003907-1, "PIGTAIL", Manufacturer="Texas Instruments", PartNumber=TESTPOINT_PIGTAIL, ComponentLink1Description="Datasheet Link", CompType="Test Point", Key=TESTPOINT_PIGTAIL, LatestRevisionDate=2017-03-09, MountType=TH, PackageReference="Pigtail Test Point", Publisher="Texas Instruments"
U1: library part CMP-0090067-1, "Driver 6A 2-OUT High Side/Low Side Half Brdg Non-Inv 16-Pin SOIC Tube", Digikey Part Number=296-44611-5-ND, Manufacturer="Texas Instruments", Max Power Dissipation=1.05W, Max Supply Voltage=18V, Min Supply Voltage=3V, Mouser Part Number=595-UCC21520DW, Nominal Supply Current=2mA, Operating Temperature Range="-40°C to +125°C", Output Voltage=6.5-25V, AEC Qualified=No, ComponentLink1Description=Datasheet, ComponentLink1URL=https://www.ti.com/lit/ds/symlink/ucc21520.pdf, datasheet=https://www.ti.com/lit/ds/symlink/ucc21520.pdf, Datasheet Path=datasheets/IC-UCC21520DW.pdf, Digikey Description="DGTL ISO 5.7KV GATE DRVR 16SOIC", Fall Time=7ns, helpURL=https://upverter.com/upn/revision/31eb2827e17e9876/, Lead Free=Yes, Number Of Drivers=2, Number Of Outputs=2, PackageReference=SOIC16, Part Number=UCC21520DW, PartNumber=UCC21520DW, Propagation Delay=19ns, Rise Time=6ns, RoHS=TRUE, SizeZ_mm=2.65mm, Standoff Height=0.1mm, TaMax_C=+125°C, TaMin_C=-40°C, TJmax_C=+130°C
ZZ1: library part CMP-0077236-1, ClassName=AssemblyNote, CompType=AssemblyNote, Key=AssemblyNote, LatestRevisionDate=2017-08-10, Publisher="Texas Instruments"
ZZ2: library part CMP-0077237-1, ClassName=AssemblyNote, CompType=AssemblyNote, Key=AssemblyNote, LatestRevisionDate=2017-08-10, Publisher="Texas Instruments"
ZZ3: library part CMP-0077238-1, ClassName=AssemblyNote, CompType=AssemblyNote, Key=AssemblyNote, LatestRevisionDate=2017-08-10, Publisher="Texas Instruments"
ZZ4 ZZ5 ZZ6 ZZ7: library part CMP-0077236-1, "These assemblies are ESD sensitive, ESD precautions shall be observed.", ClassName=AssemblyNote, CompType=AssemblyNote, Key=AssemblyNote, LatestRevisionDate=2017-08-10, Publisher="Texas Instruments"

## Via types
v1: diameter 23, hole 12, Top Layer to Bottom Layer, tented both sides, 40 vias
v2: diameter 22, hole 12, Top Layer to Bottom Layer, tented both sides, 10 vias

## Nets (pads, with @x,y where several pads share a name; then routed paths per layer and width w, separated by ;. In a path a pad name is that pad's centre, name@x,y a point inside that pad or via, vN(x,y) a via of type N, cw(c..) or ccw(c..) an arc to the next point about the centre after c; other vN are vias at no path point)
DT: C7.1 R9.2 R10.2 U1.6 | length 258
  Top Layer w20: R9.2 R10.2 C7.1 1125.59,946.16 1125.59,986.8 U1.6
EN/DIS: C6.1 R7.2 R8.2 U1.5 | length 342.4
  Top Layer w20: R7.2 881.11,1022.56 R8.2 982.5,1019.51 1066.89,1019.51 C6.1 1091.91,1000.14 1128.56,1036.8 U1.5
GND: C1.2 C2.2 C4.2 C5.2 C6.2 C7.2 J1.1 J2.1 J3.1 R2.2 R2.3 R4.1 R6.1 R8.1 R10.1 TP2.1 TP4.1 TP6.1 TP8.1 TP10.1 TP11.2 TP12.2 U1.4 | length 1174.2
  Top Layer w20: TP8.1 419.29,434.29 v1(445,434.29) ; TP6.1 372.9,938.54 v1(460,938.54) ; TP4.1 v1(442.19,1495.73) ; TP2.1 v1(899.58,2020) ; R2.2 v1(805,883.2) ; R2.3 854.21,679.39 v1(855,680.17) ; v1(945,967.44) R8.1 ; v1(960,1220.24) R6.1 ; v1(961.83,1089.54) 1068.12,1089.54 C2.2@1086.26,1107.68 ; v1(1001.28,852.32) 1003.37,854.41 R10.1 ; v1(1001.3,916.59) 1002.21,915.68 C7.2 ; v1(1040.57,1221.79) C5.2 ; TP10.1 v1(1084.32,578.72) ; C6.2 C2.2@1086.26,1107.68 ; C2.2 C2.2@1086.26,1107.68 ; R4.1 1125.84,1397.56 v1(1131.5,1403.21) ; v1(1123.02,1086.8) U1.4 ; v1(1131.72,1363.29) 1138.61,1356.4 C4.2
INA: C4.1 R3.2 R4.2 TP11.1 U1.1 | length 560.1
  Top Layer w20: R3.2 1045,1342.44 ; TP11.1 1045,1525.02 1045,1342.44 ; U1.1 1180,1238.73 C4.1 1131.72,1301.28 1090.56,1342.44 1045,1342.44
INB: C5.1 R5.2 R6.2 TP12.1 U1.2 | length 783.9
  Top Layer w20: TP12.1 855,1580 855,1256.21 R5.2 909.26,1275.36 R6.2 1086.26,1275.36 C5.1 1093.45,1276.91 1125.36,1245.01 1125.36,1186.74 1178.01,1186.74 U1.2
NetD1_2: D1.2 R15.2 | length 127.8
  Bottom Layer w20: D1.2 1683.5,985.36 R15.2
  Bottom Layer w35: D1.2 D1.2@1585.46,979.1
NetD2_1: D2.1 R11.2 | length 60
  Top Layer w20: R11.2 1916.38,1215.88 D2.1@1961.06,1215.88
NetD3_1: D3.1 R14.2 | length 125.6
  Top Layer w20: R14.2@1914.64,781.26 1957.32,781.26 1970,793.94 1970,846.26 D3.1@1961.06,855.2
NetJ1_2: J1.2 R3.1 TP3.1 | length 1035.9
  Top Layer w20: TP3.1 370,1687.49 465,1592.49 J1.2 711.77,1690 910,1690 1009.32,1590.68 R3.1@1009.32,1400.36
NetJ2_2: J2.2 R5.1 TP5.1 | length 483.5
  Top Layer w25: TP5.1 401.85,1186.74 574.26,1186.74 574.26,1189.04 J2.2 807.83,1229.04 R5.1
NetJ3_2: J3.2 R7.1 TP7.1 | length 834.6
  Top Layer w20: TP7.1 525,819.3 ; J3.2 566.56,819.3 525,819.3 ; R7.1 780.55,1040 545,1040 525,1020 525,819.3
NetJ4_1: J4.1 R2.1 | length 512.2
  Top Layer w25: J4.1 550,463.85 550,649.54 575.46,675 700.39,675 R2.1
NetJ4_2: J4.2 R9.1 TP9.1 | length 673.4
  Top Layer w25: J4.2 623.85,490 TP9.1 926.7,490 1044.3,607.6 1044.3,792.04 R9.1@1042.44,793.9
NetR18_2: R18.2 TP17.1 | length 232.2
  Top Layer w25: R18.2 2167.07,1840 TP17.1
NetR19_2: R19.2 TP20.1 | length 244.1
  Top Layer w30: R19.2 2215.7,979.1 TP20.1
NetU1_7: 
NetU1_12: 
NetU1_13: 
OUTA: R11.1 R12.1 TP13.1 U1.15 | length 627
  Top Layer w10: U1.15 1590.8,1186.8 1624.25,1220.24 1811.63,1220.24 R11.1
  Top Layer w20: R11.1 R12.1
  Top Layer w30: R12.1 1826.82,1471.82 TP13.1
OUTA_CAP: C11.1 D2.2 R12.2 R16.2 TP14.1 TP18.1 | length 718.2
  Top Layer w20: R12.2 1917.69,1290.69 D2.2 2037.27,1290.69 C11.1 2083.34,1285.51 2109.46,1259.39 ; R16.2 2112.32,1224.84 2112.32,1256.54 2109.46,1259.39 ; TP18.1 2224.83,1525 TP14.1 2109.46,1259.39
OUTB: R13.1 R14.1 TP15.1 U1.10 | length 545.2
  Top Layer w10: U1.10@1563.73,935 1802.31,935 1838.45,898.86 R13.1@1838.45,870.67
  Top Layer w15: U1.10 U1.10@1563.73,935
  Top Layer w20: R13.1@1838.45,870.67 1834.69,866.91 R14.1 1834.69,690.31 TP15.1
OUTB_CAP: C12.1 D3.2 R13.2 R17.2 TP16.1 TP21.1 | length 735.6
  Top Layer w25: R13.2 1911.62,872.81 1911.62,912.44 1928.4,929.21 D3.2 2029.43,929.21 C12.1 2051.08,907.56 R17.2 2183.98,907.56 2199.87,891.67 2199.87,660 ; TP16.1 2199.87,660 ; TP21.1 2264.11,660 2199.87,660
VCCI: C1.1 C2.1 J1.3 J2.3 J3.3 J4.3 TP1.1 U1.3 U1.8 | length 179.5
  Top Layer w20: C1.1 1082.79,1169.37 C2.1 1093.45,1164.35 1121,1136.8 U1.3
VDDA: C13.1 C14.1 D1.1 R18.1 U1.16 | length 1213.9
  Top Layer w35: v1(1531.46,1280) v1(1566.31,1280) ; U1.16 1566.31,1241.18 v1(1566.31,1280) ; R18.1 1905,1840 1770,1705 1770,1269.83 C13.1 C14.1 1651.78,1280.18 v1(1599.03,1280.18) 1598.85,1280 v1(1566.31,1280)
  Bottom Layer w35: v1(1531.46,1280) 1531.46,1191.73 1530.88,1191.16 D1.1
VDDB: C9.1 C10.2 R15.1 R19.1 U1.11 | length 511.1
  Top Layer w40: U1.11 1657.37,986.8 C10.2 1755.66,975 1760.66,980 v1(1830,980) v1(1860,980) v1(1885,980) 2006.54,980 R19.1
  Bottom Layer w20: R15.1 1825,975 v1(1830,980)
VSSA: C11.2 C13.2 C14.2 R16.1 TP13.2 TP14.2 TP19.1 U1.14
  other v2: 1654.27,1130 1681.89,1130 1709.52,1130 2052.8,1130 2080.16,1130 2107.52,1130 2134.88,1130 1950,1730 1980,1730 2010,1730
VSSB: C9.2 C10.1 C12.2 R17.1 TP15.2 TP16.2 TP22.1 U1.9
  other v1: 1945,399.1 1985,399.1 2025,399.1 2200,430 2200,457.5 2200,485 2032.2,690 2014.49,720 2047.57,720 2120,735.6 2120,774.18 1750,795 1785.54,795 2120,812.76 1541.58,842.46 1573.93,842.46 1606.28,842.46 1638.64,842.46
pads on no net: FID1.1 FID2.1 FID3.1 H1.0 H2.0 H3.0 H4.0 LBL1.0 SH1.0 SH2.0 U1.7 U1.12 U1.13

## Polygon pours and split planes (outlines as drawn)
VCCI on Top Layer "Top Layer - VCCI" (solid, remove dead copper, pour order 134): 247.48,2068.88 247.68,304.27 687,304.27 702.5,319.77 1210,319.77 1210,2062.85
VSSB on Top Layer "Top Layer-VSSB" (solid, remove dead copper, pour order 132): 1525.22,1011 2340,1011 2340,331 1770.93,331 1719.7,382.23 1719.7,806 1525.41,806 1525.22,1005.38
VSSA on Top Layer "Top Layer-VSSA" (solid, remove dead copper, pour order 120): 1813.84,1115 1988.69,1115.5 1988.32,1115.14 2335.71,1115.04 2335.71,1863.92 1892.76,1860.94 1827.09,1795.28 1750.91,1719.09 1750.91,1297.58 1512.13,1297.58 1512.13,1115
no net on Top Layer "Top Layer-No Net 13" (solid, pour order 204): 976.54,1240
no net on Top Layer "Top Layer-No Net 14" (solid, pour order 202): 982.5,1247.8
VCCI on Top Layer "VCCI_L01_P192" (solid, remove dead copper, pour order 192): 953.44,1202.1 949.13,1115.14 1061.08,1110.39 1061.08,1127.78 1210,1125 1210,1163.14 1110.34,1163.14 1104.49,1168.99 1104.49,1191.02
OUTB on Top Layer "OUTB" (solid, remove dead copper, pour order 184): 1802.94,718.17 1797.48,945 1857.83,945 1853.96,941.13 1853.96,718.17
no net on Top Layer "Top Layer-No Net 15" (solid, pour order 178): 1808.08,1302.91
OUTA on Top Layer "OUTA" (solid, remove dead copper, pour order 176): 1808.47,1303.8 1806.94,1300.02 1806.94,1176.51 1845,1176.51 1847,1182.42 1847,1303.8
no net on Top Layer "Top Layer-No Net 3" (solid, pour order 174): 977.19,1072.91
no net on Top Layer "Top Layer-No Net 4" (solid, pour order 162): 1021.87,1235
no net on Top Layer "Top Layer-No Net 5" (solid, pour order 160): 1021.87,1235
no net on Top Layer "Top Layer-No Net 6" (solid, pour order 156): 1611.37,1310
VDDA on Top Layer "VDDA" (solid, remove dead copper, pour order 154): 1512.13,1256.54 cw(c1570.98,1256.54) 1529.37,1298.15 1612.59,1298.15 1612.59,1227.83 1584.47,1227.83 1512.13,1227.83
no net on Top Layer "Top Layer-No Net 7" (solid, pour order 146): 1492.14,1325
no net on Top Layer "Top Layer-No Net 8" (solid, pour order 124): 1890,1495
no net on Top Layer "Top Layer-No Net 9" (solid, pour order 110): 1510,1290.69
no net on Top Layer "Top Layer-No Net 10" (solid, pour order 108): 1519.61,1115
no net on Top Layer "Top Layer-No Net 11" (solid, pour order 106): 1520.7,1120
no net on Top Layer "Top Layer-No Net 12" (solid, pour order 104): 1808.75,1115
OUTA on Top Layer "OUTA_L01_P088" (solid, remove dead copper, pour order 88): 1880.28,1264.02
no net on Top Layer "Top Layer-No Net 1" (solid, pour order 60): 1869.37,1600
no net on Top Layer "Top Layer-No Net 2" (solid, pour order 58): 1760,1580
no net on Top Layer "Top Layer-No Net" (solid, pour order 56): 1820,1650
VSSB on Bottom Layer "Bottom Layer-VSSB" (solid, remove dead copper, pour order 130): 1525.22,1010 2340,1010 2340,330 1770.93,330 1719.7,381.23 1719.7,805 1525.41,805 1525.22,1004.38
VSSA on Bottom Layer "Bottom Layer-VSSA" (solid, remove dead copper, pour order 126): 1813.84,1115 1988.69,1115.5 1988.32,1115.14 2345,1115.04 2345,1863.98 1892.76,1860.94 1827.09,1795.28 1750.91,1719.09 1750.91,1297.58 1515.8,1297.58 ccw(c1560,1274.85) 1510.3,1274.7 1510.3,1115
GND on Bottom Layer "GND_L02_P186" (solid, remove dead copper, pour order 186): 936.61,1133.99 930,1049.35 1056.24,1049.35 1065.6,1040 1106.93,1040 1106.93,1041.93 1135,1070 1210,1070 1210,1110 1201.91,1118.09 1116.5,1118.09 1100.6,1133.99
GND on Bottom Layer "GND" (solid, remove dead copper, pour order 196): 925.35,981.93 925.35,831.25 1063.1,831.25 1067.56,835.71 1060,843.27 1060,984
GND on Bottom Layer "GND" (solid, remove dead copper, pour order 188): 908.04,993.25 925.75,958 995,828.84 1062.15,828.84 1065,825.99 1070.36,831.35 1070.36,958 1045.25,958 1010,993.25
GND on Bottom Layer "Bottom Layer- GND" (solid, remove dead copper, pour order 142): 242.49,2068.91 242.68,304.27 687.59,304.27 703.09,319.77 1215,319.77 1215,2062.82
no net on Bottom Layer "Bottom Layer-No Net 1" (solid, pour order 118): 1501.6,1206.46
no net on Bottom Layer "Bottom Layer-No Net" (solid, pour order 48): 1531.47,995.21

## Keep-outs
Keep-Out Layer:
  lines w10: 0,0 0,1500
  text ".Layer_Name" at 577,-858.49 h60

## Other copper
Top Layer:
  pour cut-out: 2262.5,877.2
  pour cut-out: 2235.71,855.2
  region: 1755,1228.59
  text ".Layer_Name" at 577,-858.49 h60
Bottom Layer:
  pour cut-out: 1728.86,1010 1738.86,1010 1738.86,933.5 1728.86,933.5
  pour cut-out: 1530,1315.35
  text ".Layer_Name" at 577,-858.49 h60

## Silkscreen, mask and mechanical layers (free items; w line width, h text height)
Top Overlay:
  region: 2721.4,1984.48 2421.4,1984.48 2421.4,1884.48 2721.4,1884.48
  text ".PRJ_Number" at 1806.35,1904.48 h60
  text "G" at 2286.35,1904.48 h60
  text "-" at 2356.9,1904.48 h60
  text "VCCI" at 465,1680 h45
  text "INA" at 465,1581.91 h45
  text "GND" at 465,1480 h45
  text "VCCI" at 460,1325 h45
  text "INB" at 460,1215 h45
  text "GND" at 460,1115 h45
  text "VCCI" at 450,965 h45
  text "EN/DIS" at 445,858.19 h45
  text "GND" at 450,748.14 h45
  text "VCCI" at 450,585 h45
  text "DT" at 450,491.57 h45
  text "R2" at 450,390 h45
  text ".Layer_Name" at 577,-858.49 h60
Bottom Overlay:
  text ".Layer_Name" at 577,-858.49 h60
Top Paste:
  text ".Layer_Name" at 577,-858.49 h60
Bottom Paste:
  text ".Layer_Name" at 577,-858.49 h60
Top Solder:
  text ".Layer_Name" at 577,-858.49 h60
  text ".Layer_Name" at 577,-858.49 h60
Bottom Solder:
  text ".Layer_Name" at 577,-858.49 h60
Drill Guide:
  text ".Layer_Name" at 577,-858.49 h60
M1 Board Outline:
  lines w5: 1331.72,735.4 1411.72,735.4 ccw(c1411.72,755.4) 1431.72,755.4 1431.72,815.4 1431.72,1275.4 1431.72,1335.4 ccw(c1411.72,1335.4) 1411.72,1355.4 1331.72,1355.4 ccw(c1331.72,1335.4) 1311.72,1335.4 1311.72,1275.4 1311.72,815.4 1311.72,755.79 ccw(c1331.72,755.79) 1331.72,735.79
  lines w10: 2750,0 0,0 0,2300 2750,2300 ; 2751.35,0.83 2751.35,2300.83
  text ".Layer_Name" at 577,-858.49 h60
M2 Board Dimensions:
  rectangle: 0,-275 125,-150
  rectangle: 125,-400 500,-275
  lines w7: 0,-275 1000,-275 ; 125,-400 125,-150 ; 250,-400 250,-150 ; 500,-400 500,-150 ; 750,-400 750,-150 ; 0,-400 1000,-400 1000,-150 0,-150 0,-400
  text ".Layer_Name" at 577,-858.49 h60
M3 3D STEP Top:
  text ".Layer_Name" at 577,-858.49 h60
M4 3D STEP Bottom:
  text ".Layer_Name" at 577,-858.49 h60
M5 Assembly Top:
  lines w10: -292,-930.17 6308,-930.17 ; -292,-726.83 6310,-726.83 ; -292,-523.5 -292,-1133.5 3713,-1133.5 6310,-1133.5 6310,-523.5 -291.5,-523.5 -291.5,-1133.5 1284,-1133.5 ; 2173,-1133.5 2173,-523.5 ; 3440,-726.83 3440,-523.5 ; 4280,-726.83 4280,-523.5 ; 4902,-1140 4902,-937.17
  text "COMPONENTS MARKED 'DNP' SHOULD NOT BE POPULATED." at 1153.5,-318.5 h60
  text "ASSEMBLY VARIANT:" at 1153,-434 h60
  text ".VariantName" at 2189,-434 h60
  text "PCB VIEWED FROM TOP SIDE" at -228.5,-655.67 h60
  text "BOARD #:" at 2248,-655.67 h60
  text ".PRJ_Number" at 2793.5,-655.67 h60
  text "REV:" at 3638,-655.67 h60
  text ".PCB_Rev" at 3929.5,-655.67 h60
  text "SVN REV:" at 4476,-655.67 h60
  text ".VersionControl_RevNumber" at 4982,-655.67 h60
  text "TID #:" at 2248,-859 h60
  text ".TID" at 2793.5,-859 h60
  text "PLOT NAME =" at -228.5,-1064.34 h60
  text ".plot_File_Name" at 577,-1064.34 h60
  text "GENERATED    :" at 2250,-1064.34 h60
  text ".Print_Date" at 3119.5,-1064.34 h60
  text ".Print_Time" at 3848.5,-1064.34 h60
  text "TEXAS INSTRUMENTS" at 5113,-1064.34 h60
M6 Assembly Bottom:
  lines w10: -292.5,-727.33 6309.5,-727.33 ; -290.5,-930.67 6309.5,-930.67 ; 1115.5,-1140.5 1115.5,-937.67 ; 1737.5,-727.33 1737.5,-524 ; 2577.5,-727.33 2577.5,-524 ; 3844.5,-1134 3844.5,-524 ; 4733.5,-1134 6309,-1134 6309,-524 -292.5,-524 -292.5,-1134 2304.5,-1134 6309.5,-1134 6309.5,-524
  text "COMPONENTS MARKED 'DNP' SHOULD NOT BE POPULATED." at 6102,-318 h60
  text ".VariantName" at 5058,-434 h60
  text "ASSEMBLY VARIANT:" at 6097,-434 h60
  text ".VersionControl_RevNumber" at 1035.5,-656.17 h60
  text "SVN REV:" at 1541.5,-656.17 h60
  text ".PCB_Rev" at 2088,-656.17 h60
  text "REV:" at 2379.5,-656.17 h60
  text ".PRJ_Number" at 3224,-656.17 h60
  text "BOARD #:" at 3769.5,-656.17 h60
  text "PCB VIEWED FROM BOTTOM SIDE" at 6246,-656.17 h60
  text ".TID" at 3224,-859.5 h60
  text "TID #:" at 3769.5,-859.5 h60
  text "TEXAS INSTRUMENTS" at 904.5,-1064.84 h60
  text ".Print_Time" at 2169,-1064.84 h60
  text ".Print_Date" at 2898,-1064.84 h60
  text "GENERATED    :" at 3767.5,-1064.84 h60
  text ".plot_File_Name" at 5440.5,-1064.84 h60
  text "PLOT NAME =" at 6246,-1064.84 h60
M9 Title Sheet:
  drawing of 57 lines, arcs and shapes, not listed
  text "1" at 739.84,8036.5 h70
  text "2" at 3235.5,8036.5 h70
  text "3" at 5724.84,8036.5 h70
  text "4" at 8231.51,8036.5 h70
  text "5" at 10730.5,8036.5 h70
  text "6" at 13235.5,8036.5 h70
  text "A" at -416.5,6893.5 h70
  text "A" at 14383.5,6893.5 h70
  text "B" at -416.5,4513.5 h70
  text "B" at 14383.5,4513.5 h70
  text "C" at -416.5,2138.5 h70
  text "C" at 14383.5,2138.5 h70
  text "PROJECT TITLE:" at 11343.5,277.5 h45
  text ".PRJ_Title" at 11393.5,144.17 h70